# Altium PCB Vertigo Core.PcbDoc (part 1 of 2)
Units mm, origin at the board's own origin, x right, y up, seen from the top; angles counter-clockwise.
Board outline 68.33 x 88.9 mm, 4 copper layers (Power, Signal1, Signal 2, Ground); 94 components, 110 nets, 437 pads, 167 vias.
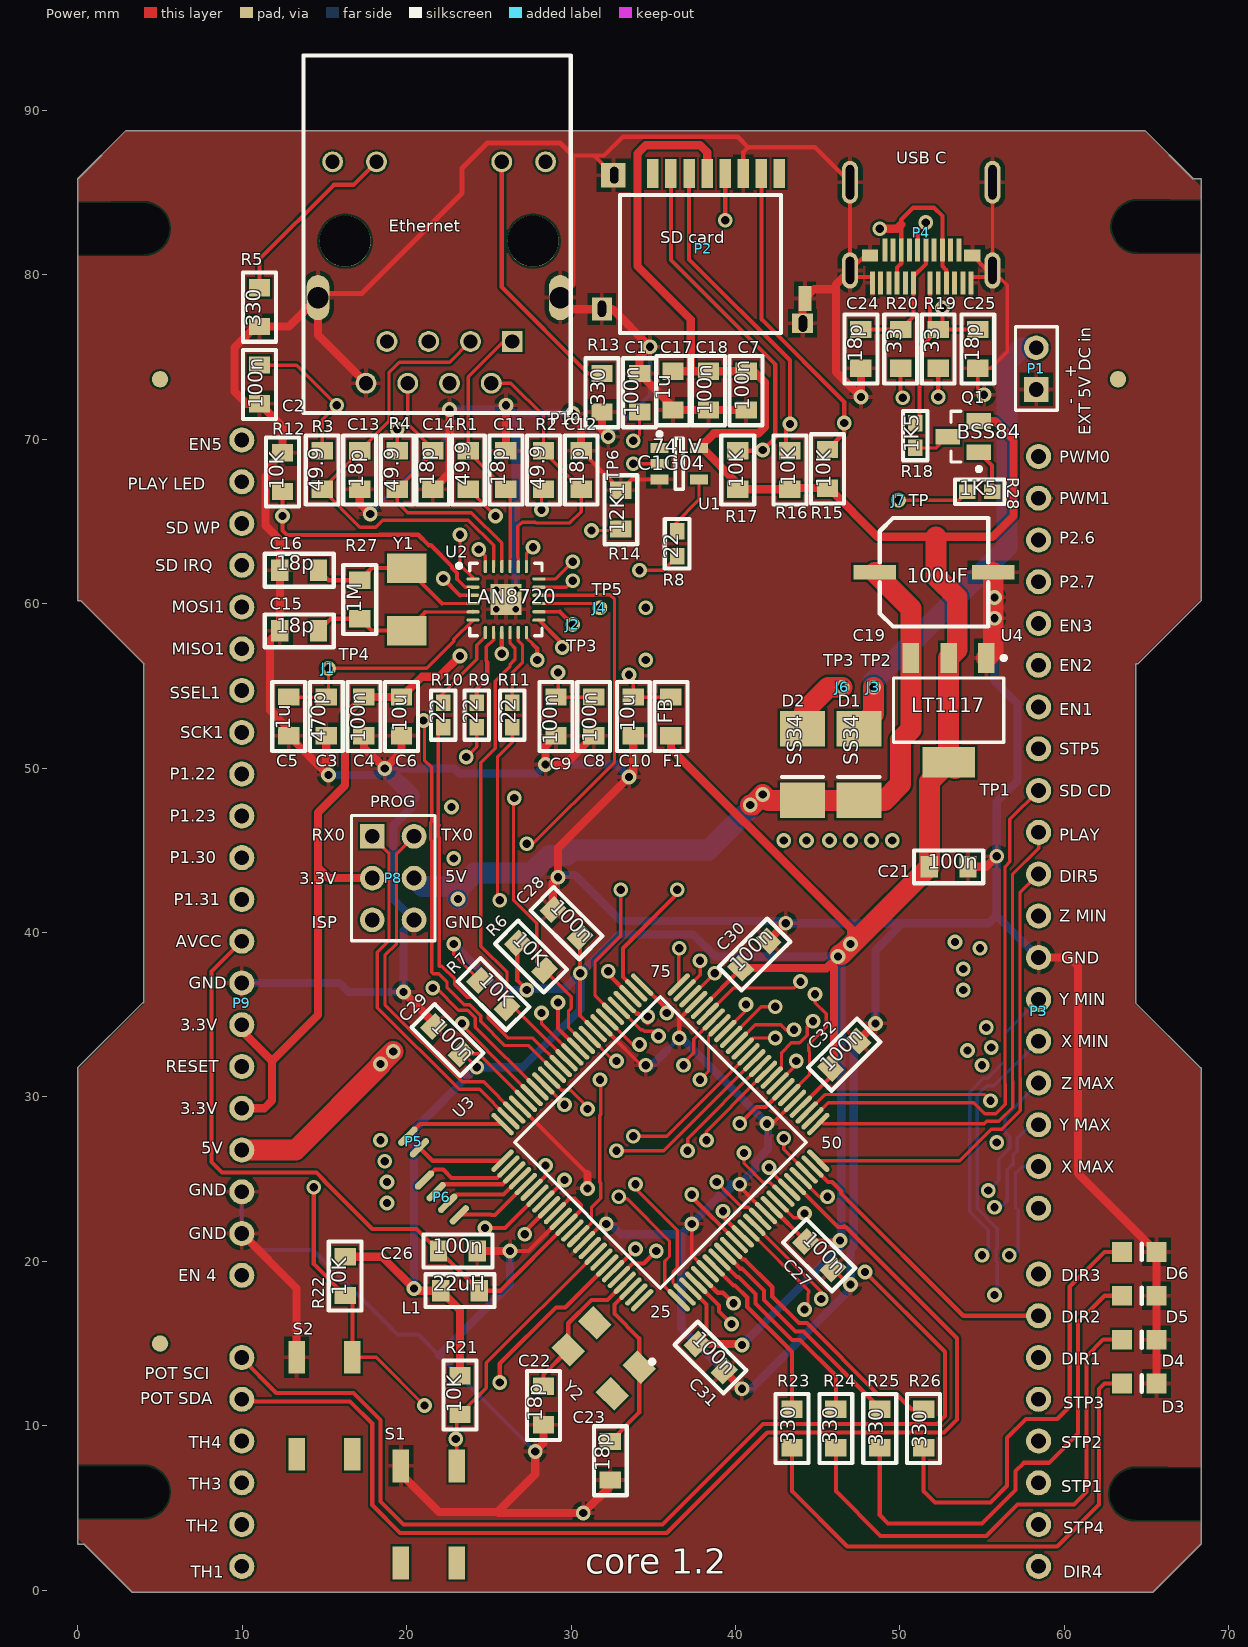
[diagram p0: Power view]
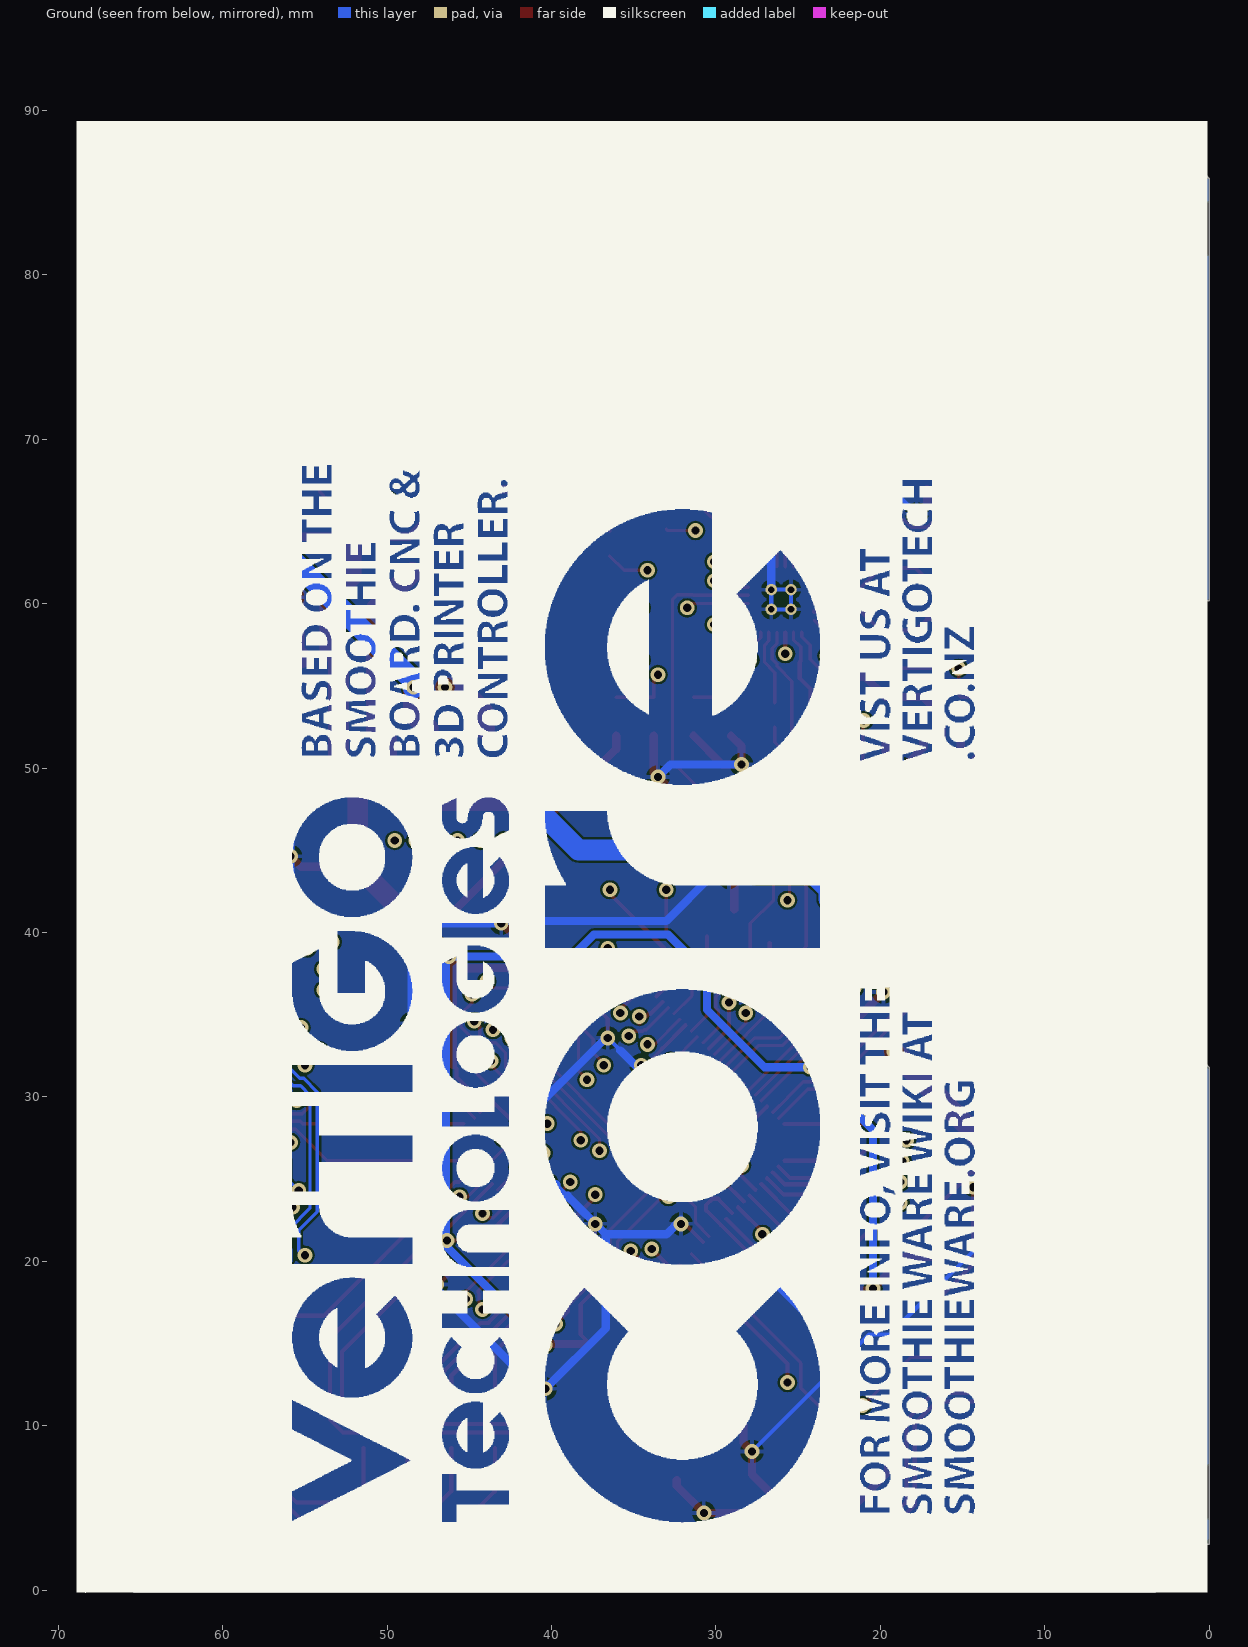
[diagram p1: Ground view, seen from below]
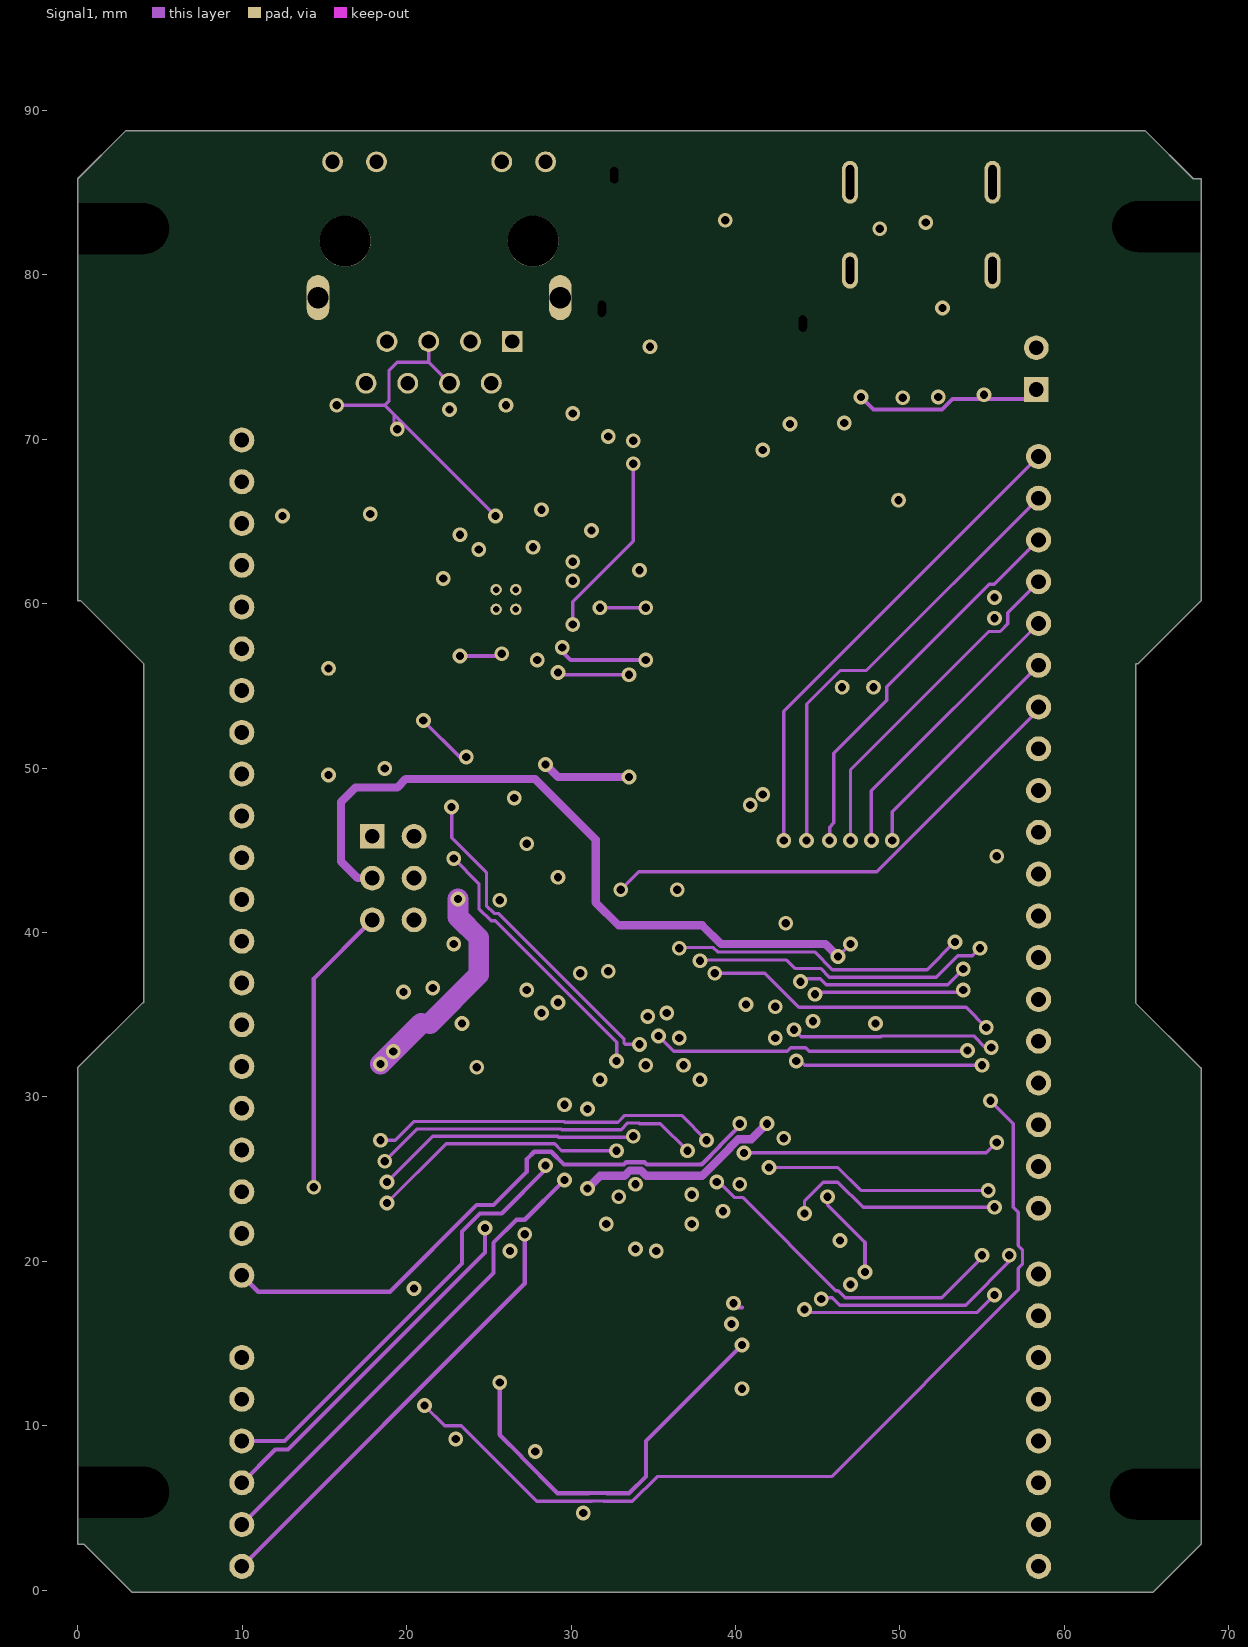
[diagram p2: Signal1]
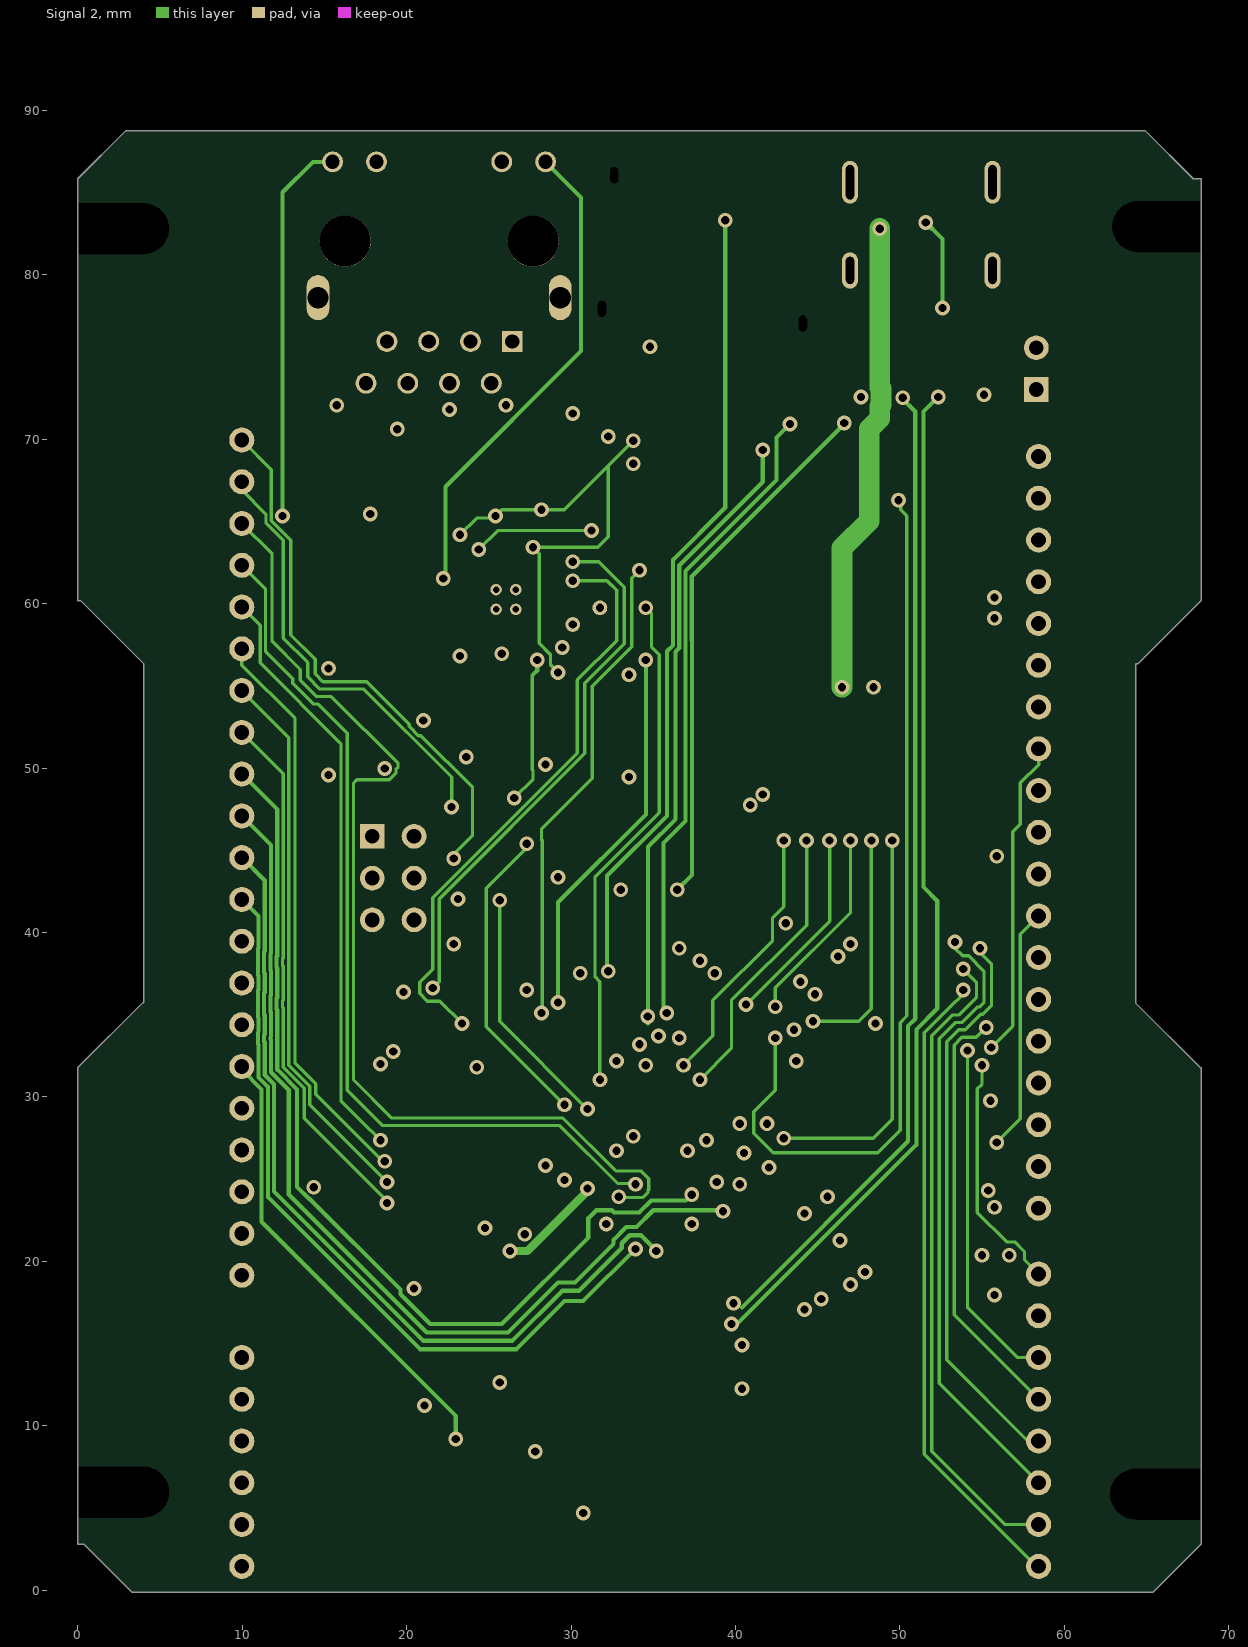
[diagram p3: Signal 2]

## Layer stack, top to bottom
Power: signal copper 0.0356
Dielectric: core 0.32, FR-4, Dk 4.8
Signal1: signal copper 0.0356
Dielectric: prepreg 0.32, FR-4, Dk 4.8
Signal 2: signal copper 0.0356
Dielectric: core 0.32, FR-4, Dk 4.8
Ground: signal copper 0.0356

## Board outline
3.175,0 3.302,-0.127 65.024,-0.127 65.389,-0.127 68.326,2.81 68.326,31.781 68.263,31.781 64.326,35.718 64.326,56.357 64.493,56.357 68.326,60.19 68.326,85.836 67.834,85.836 64.897,88.773 3.81,88.773 2.937,88.773 0,85.836 0,60.19 0.167,60.19 4,56.357 4,35.718 3.937,35.718 0,31.781 0,2.81 0.365,2.81 3.175,0

## Design rules (kind name [scope] priority, off if disabled: settings)
Clearance [All] p1: gap=0.127
DiffPairsRouting [All] p1: maxlimit=0.254 minlimit=0.254 mostfreqgap=0.254 maxuncoupledlength=12.7
MinimumSolderMaskSliver [All] p1: minsoldermaskwidth=0.076
PolygonConnect [All] p1: connectstyle=Relief reliefconductorwidth=0.254 reliefentries=4 polygonreliefangle="90 Angle" airgapwidth=0.254
RoutingVias [All] p1: holewidth=0.5 width=0.9 viastyle="Through Hole" minholewidth=0.5 minwidth=0.9 maxholewidth=0.5 maxwidth=0.9
SolderMaskExpansion [All] p1: expansion=0.102
Width [All] p1: maxlimit=1.27 minlimit=0.2 preferedwidth=0.254
26 further rules are at their usual default settings.

## Classes and differential pairs
component class "32 bit cnc v3.1": P10
differential pair NewDifferentialPair1: +TX0 -RX0

## Components (designator, comment, footprint, x,y, rotation, side; value= is the part's Value field where it differs from the comment)
C1 "100nF" 0805 34.163,72.825 r90 top
C2 "100nF" 0805 11.049,73.333 r270 top
C3 "470pF" 0805 15.113,53.14 r270 top
C4 "100nF" 0805 17.399,53.14 r270 top
C5 "1uF" 0805 12.827,53.14 r270 top
C6 "10uF" 0805 19.685,53.14 r270 top
C7 "100nF" 0805 40.64,72.952 r270 top
C8 "100nF" 0805 31.369,53.14 r270 top
C9 "100nF" 0805 29.083,53.14 r270 top
C10 "10uF" 0805 33.782,53.14 r270 top
C11 "18pf" 0805 26.035,68.126 r90 top
C12 "18pf" 0805 30.607,68.126 r90 top
C13 "18pf" 0805 17.145,68.126 r270 top
C14 "18pf" 0805 21.59,68.126 r270 top
C15 "18pF" 0805 13.462,58.347 r0 top
C16 "18pF" 0805 13.462,62.03 r0 top
C17 "1uF" 0805 36.195,72.952 r90 top
C18 "100nF" 0805 38.354,72.952 r90 top
C19 "10uF" "470uf/ 100uf 50v smd" 52.07,61.903 r270 top
C21 "100nF" 0805 52.959,43.996 r180 top
C22 "18pF" 0805 28.321,11.23 r90 top
C23 "18pF" 0805 32.385,7.874 r90 top
C24 "18pF" 0805 47.625,75.492 r270 top
C25 "18pF" 0805 54.737,75.492 r270 top
C26 "100nF" 0805 23.114,20.628 r0 top
C27 "100nF" 0805 45.085,20.374 r135 top
C28 "100nF" 0805 29.718,40.567 r315 top
C29 "100nF" 0805 22.479,33.455 r315 top
C30 "100nF" 0805 41.148,38.662 r225 top
C31 "100nF" 0805 38.481,14.151 r135 top
C32 "100nF" 0805 46.609,32.566 r225 top
D1 "SS34" Diode 47.498,52.451 r270 top
D2 "SS34" Diode 44.069,52.451 r270 top
D3 "LED2" "0805 LED" 63.5,12.573 r0 top
D4 "LED2" "0805 LED" 63.5,15.24 r0 top
D5 "LED2" "0805 LED" 63.5,17.907 r0 top
D6 "LED2" "0805 LED" 63.5,20.574 r0 top
F1 "ferrite bead" 0805 36.068,53.14 r90 top
J1 "TP4" "test point" 15.24,56.061 r0 top locked
J2 "TP6" "test point" 30.099,58.728 r0 top locked
J3 "TP2" "test point" 48.387,54.918 r0 top locked
J4 "TP5" "test point" 31.75,59.744 r0 top locked
J6 "TP3" "test point" 46.482,54.918 r0 top locked
J7 "TP6" "test point" 49.911,66.294 r0 top
L1 "22uH" 0805 23.241,18.215 r180 top
P1 "Header 2" HDR1X2 58.293,73.025 r90 top
P2 "micro sd" "DM3 SD card" 42.672,86.16 r180 top
P3 "gem shield 1 of 2" "gem shield 2 of 2" 58.433,1.451 r0 top locked
P4 "usb c socket" "USB C type" 55.626,80.264 r180 top
P5 "JTAG2" JTAG2 20.066,27.613 r315 top
P6 "JTAG" JTAG 21.082,24.946 r315 top
P8 "TTL" HDR2X3 17.907,45.847 r270 top
P9 "gem shield 2 of 2" "gem shield 1 of 2" 10.033,1.451 r0 top locked
P10 "HanRun HR911105A" Hanrun 29.972,93.091 r180 top
Q1 "BSS84" SOT23 53.848,70.158 r180 top
R1 "49.9" 0805 23.749,68.126 r270 top
R2 "49.9" 0805 28.321,68.126 r270 top
R3 "49.9" 0805 14.859,68.126 r90 top
R4 "49.9" 0805 19.431,68.126 r90 top
R5 "330" 0805 11.049,78.032 r90 top
R6 "10k" 0805 27.559,38.535 r135 top
R7 "10k" 0805 25.273,36.249 r135 top
R8 "22R" 0603 36.449,64.389 r270 top
R9 "22R" 0603 24.257,53.975 r270 top
R10 "22R" 0603 22.225,53.975 r270 top
R11 "22R" 0603 26.416,53.975 r270 top
R12 "10k" 0805 12.446,67.999 r90 top
R13 "330" 0805 31.877,72.825 r90 top
R14 "12.1k" 0805 33.02,65.713 r270 top
R15 "10k" 0805 45.593,68.199 r270 top
R16 "10k" 0805 43.307,68.126 r270 top
R17 "10k" 0805 40.132,68.126 r270 top
R18 "1.5K" 0603 50.927,69.469 r90 top
R19 "33R" 0805 52.324,75.492 r90 top
R20 "33R" 0805 50.038,75.492 r90 top
R21 "10k" 0805 23.241,11.865 r90 top
R22 "10k" 0805 16.256,19.104 r90 top
R23 "330" 0805 43.434,9.833 r270 top
R24 "330" 0805 46.101,9.833 r270 top
R25 "330" 0805 48.768,9.833 r270 top
R26 "330" 0805 51.435,9.833 r270 top
R27 "1M" 0805 17.145,60.252 r270 top
R28 "1.5K" 0603 54.102,66.802 r0 top
S1 "SW-PB" SMD_push_button 19.05,0.562 r90 top
S2 "SW-PB" SMD_push_button 12.7,7.166 r90 top
U1 "74LVC1G04" SOT23-5 36.576,68.507 r0 top
U2 "LAN8720" QFN50P400X400X100-24N 26.035,60.252 r0 top
U3 "LPC1769" TSQFP50P1600X1600X160_HS-101N 35.433,27.232 r45 top
U4 "LT1117-3.3v" SOT223 52.959,53.521 r270 top
Y1 "25 MHz" "25 MHz crystal M445" 18.796,57.458 r90 top
Y2 "12 MHz" SMD_crystal 32.512,11.938 r135 top
? "" fiducial#1 2,2 r0 top
? "" fiducial#2 2,86.646 r0 top
? "" fiducial#3 70.612,78.867 r0 top

## Footprints (in the part's own frame and the unit in brackets; to place one, negate y for a bottom-side part, rotate by r counter-clockwise, add the part's x,y. Pads: shape width x height; smd on the part's side, far side on the other; paste and mask are expansions set on the pad)
"25 MHz crystal M445" [mm]
  rect 1.8x2.4 smd: 1(0.9,-1.2) 2(4.7,-1.2)
"470uf/ 100uf 50v smd" [mm]
  rect 0.9x2.6 smd: 1(0,-3.6) 2(0,3.6)
  silkscreen extent -3.3,-3.3 3.3,3.3
0603 [mm]
  rect 1x0.9 smd: 1(0,0) 2(1.5,0)
  silkscreen extent -0.75,-0.75 2.25,0.75, body extent 0,-0.5 1.5,0.5, height 3
0805 [mm]
  rect 1.05x1.3 smd: 1(-1.175,0) 2(1.175,0)
  silkscreen extent -2.1,-1 2.1,1, body extent -1.15,-0.67 1.15,0.68, height 0.76
"0805 LED" [mm]
  rect 1.2x1.2 smd: 1(0,0) 2(2.1,0)
  silkscreen extent 1.2,-0.5 1.2,0.5, body extent 0,-0.6 2.1,0.6, height 2
Diode [mil]
  rect 85x107.99 smd: 1(1.96,0) 2(174.02,0)
  silkscreen extent 118,-49 118,49, body extent 10,-59 167,59, height 197
"DM3 SD card" [mm]
  rect 0.7x1.75 smd: 1(7.7,0) 2(6.6,0) 3(5.5,0) 4(4.4,0) 5(3.3,0) 6(2.2,0) 7(1.1,0) 8(0,0)
  round 0 hole 0.5 slot 1 at 90 deg: 9(10.05,0.1) 10(10.8,8.225) 13(-1.425,9.125)
  rect 1.5x1.5 smd: 9(10.1,0.1)
  rect 1.2x1.4 smd: 10(10.8,8.25)
  rect 0.8x1.5 smd: 12(-1.55,7.6)
  rect 1.25x1.2 smd: 13(-1.4,9.1)
  silkscreen extent -0.1,1.3 9.7,9.7
fiducial#1 [mm]
  round 1 smd paste+0 mask+0.5: 0(3,13)
fiducial#2 [mm]
  round 1 smd paste+0 mask+0.5: 0(3,-13)
fiducial#3 [mm]
  round 1 smd paste+0 mask+0.5: 0(-7.352,-5.221)
"gem shield 1 of 2" [mm]
  round 1.524 hole 0.9: 1(-0.06,68.5) 2(-0.06,65.96) 3(-0.06,63.42) 4(-0.06,60.88) 5(-0.06,58.34) 6(-0.06,55.8) 7(-0.06,53.26) 8(-0.06,50.72) 9(-0.06,48.18) 10(-0.06,45.64) 11(-0.06,43.1) 12(-0.06,40.56) 13(-0.06,38.02) 14(-0.06,35.48) 15(-0.06,32.94) 16(-0.06,30.4) 17(-0.06,27.86) 18(-0.06,25.32) 19(-0.06,22.78) 20(-0.06,20.24) 21(-0.06,17.7) 22(-0.06,12.7) 23(-0.06,10.16) 24(-0.06,7.62) 25(-0.06,5.08) 26(-0.06,2.54) 27(-0.06,0)
"gem shield 2 of 2" [mil]
  round 60 hole 35.43: 28(0,0) 29(0,100) 30(0,200) 31(0,300) 32(0,400) 33(0,500) 34(0,600) 35(0,700) 36(0,857.48) 37(0,957.48) 38(0,1057.48) 39(0,1157.48) 40(0,1257.48) 41(0,1357.48) 42(0,1457.48) 43(0,1557.48) 44(0,1657.48) 45(0,1757.48) 46(0,1857.48) 47(0,1957.48) 48(0,2057.48) 49(0,2157.48) 50(0,2257.48) 51(0,2357.48) 52(0,2457.48) 53(0,2557.48) 54(0,2657.48)
Hanrun [mil]
  rect 50x50 hole 34.02: 1(140,675)
  round 50 hole 34.02: 2(190,775) 3(240,675) 4(290,775) 5(340,675) 6(390,775) 7(440,675) 8(490,775) 9(60,245) 10(165,245) 11(465,245) 12(570,245)
  round 122.05 hole 122.05: 13(540,435) 14(90,435)
  oval 54.02x107.99 hole 51.18: 16(25,570) 16(605,570)
  silkscreen extent 0,-10 640,846, body extent 5,-4 630,839, height 551
HDR1X2 [mm] "Connector; Header; 2 Position"
  rect 1.5x1.5 hole 0.9: 1(0,0)
  round 1.5 hole 0.9: 2(2.54,0)
  silkscreen extent -1.27,-1.27 3.81,1.27
HDR2X3 [mm] "Connector; Header; 3x2 Position"
  rect 1.5x1.5 hole 0.9: 1(0,0)
  round 1.5 hole 0.9: 2(0,2.54) 3(2.54,0) 4(2.54,2.54) 5(5.08,0) 6(5.08,2.54)
  silkscreen extent -1.27,-1.27 6.35,3.81
JTAG [mm]
  oval 0.4x1.5 smd: 1(0,0) 2(1,0) 3(2,0) 4(3,0)
JTAG2 [mm]
  oval 0.4x1.5 smd: 1(0,0) 2(1,0)
QFN50P400X400X100-24N [mm] "QFN, 24-Leads, Body 4.00x4.00mm, Pitch 0.50mm, IPC Medium Density"
  oval 0.8x0.2 smd: 1(-2,1.25) 2(-2,0.75) 3(-2,0.25) 4(-2,-0.25) 5(-2,-0.75) 6(-2,-1.25) 13(2,-1.25) 14(2,-0.75) 15(2,-0.25) 16(2,0.25) 17(2,0.75) 18(2,1.25)
  oval 0.2x0.8 smd: 7(-1.25,-2) 8(-0.75,-2) 9(-0.25,-2) 10(0.25,-2) 11(0.75,-2) 12(1.25,-2) 19(1.25,2) 20(0.75,2) 21(0.25,2) 22(-0.25,2) 23(-0.75,2) 24(-1.25,2)
  round 0.7 hole 0.4: 25(-0.6,-0.6) 25(-0.6,0.6) 25(0.6,-0.6) 25(0.6,0.6)
  rect 1.9x1.9 smd: 25(0,0)
  silkscreen extent -2.97,-2.2 2.2,2.2, body extent -2.05,-2.05 2.05,2.05, height 1
SMD_crystal [mm]
  rect 1.6x1.3 smd: 0(0,0) 0(3.8,-2.3) 1(0,-2.3) 2(3.8,0)
SMD_push_button [mm]
  rect 2x1 smd: 0(1.1,-0.6) 0(1.1,-4) 1(7,-0.6) 2(7,-4)
  body extent 1,-4 7.1,-0.6, height 9
SOT23 [mm] "SOT23, 3-Leads, Body 2.92x2.40mm, Pitch 0.95mm, IPC Medium Density"
  rect 1.5x0.95 smd: 1(-0.95,0.95) 2(-0.95,-0.95) 3(0.95,0)
  silkscreen extent -1.08,-1.55 0.75,2.1, body extent -0.75,-1.56 0.75,1.56, height 1.2
SOT23-5 [mm] "SOT23, 5-Leads, Body 2.90x2.80mm, Pitch 0.95mm, IPC Medium Density"
  rect 1.1x0.6 smd: 1(-1.2,0.95) 2(-1.2,0) 3(-1.2,-0.95) 4(1.2,-0.95) 5(1.2,0.95)
  silkscreen extent -1.32,-1.55 0.25,1.92, body extent -0.87,-1.52 0.87,1.53, height 1.45
SOT223 [mm] "SOT223, 4-Leads, Body 6.50x7.00mm (avg), Pitch 2.30mm, IPC Medium Density"
  rect 1.85x1 smd: 1(-3.175,-2.3) 2(-3.175,2.3) 3(-3.175,0)
  rect 1.85x3.2 smd: 3(3.175,0)
  silkscreen extent -3.3,-3.35 1.95,3.48, body extent -1.85,-3.35 1.85,3.35, height 1.6
"test point" [mm]
  round 0.9 hole 0.5: 1(0,0)
TSQFP50P1600X1600X160_HS-101N [mm] "TSQFP, 100-Leads, Body 14.00x14.00mm, Pitch 0.50mm, Thermal Pad 10.00x10.00mm, IPC Medium Density"
  round 1 on Top Paste: 0(-7.975,7.975) 0(7.95,-7.95)
  round 1.524 on Top Solder: 0(-7.975,7.975) 0(7.95,-7.95)
  oval 1.8x0.3 smd: 1(-7.575,6) 2(-7.575,5.5) 3(-7.575,5) 4(-7.575,4.5) 5(-7.575,4) 6(-7.575,3.5) 7(-7.575,3) 8(-7.575,2.5) 9(-7.575,2) 10(-7.575,1.5) 11(-7.575,1) 12(-7.575,0.5) 13(-7.575,0) 14(-7.575,-0.5) 15(-7.575,-1) 16(-7.575,-1.5) 17(-7.575,-2) 18(-7.575,-2.5) 19(-7.575,-3) 20(-7.575,-3.5) 21(-7.575,-4) 22(-7.575,-4.5) 23(-7.575,-5) 24(-7.575,-5.5) 25(-7.575,-6) 51(7.575,-6) 52(7.575,-5.5) 53(7.575,-5) 54(7.575,-4.5) 55(7.575,-4) 56(7.575,-3.5) 57(7.575,-3) 58(7.575,-2.5) 59(7.575,-2) 60(7.575,-1.5) 61(7.575,-1) 62(7.575,-0.5) 63(7.575,0) 64(7.575,0.5) 65(7.575,1) 66(7.575,1.5) 67(7.575,2) 68(7.575,2.5) 69(7.575,3) 70(7.575,3.5) 71(7.575,4) 72(7.575,4.5) 73(7.575,5) 74(7.575,5.5) 75(7.575,6)
  oval 0.3x1.8 smd: 26(-6,-7.575) 27(-5.5,-7.575) 28(-5,-7.575) 29(-4.5,-7.575) 30(-4,-7.575) 31(-3.5,-7.575) 32(-3,-7.575) 33(-2.5,-7.575) 34(-2,-7.575) 35(-1.5,-7.575) 36(-1,-7.575) 37(-0.5,-7.575) 38(0,-7.575) 39(0.5,-7.575) 40(1,-7.575) 41(1.5,-7.575) 42(2,-7.575) 43(2.5,-7.575) 44(3,-7.575) 45(3.5,-7.575) 46(4,-7.575) 47(4.5,-7.575) 48(5,-7.575) 49(5.5,-7.575) 50(6,-7.575) 76(6,7.575) 77(5.5,7.575) 78(5,7.575) 79(4.5,7.575) 80(4,7.575) 81(3.5,7.575) 82(3,7.575) 83(2.5,7.575) 84(2,7.575) 85(1.5,7.575) 86(1,7.575) 87(0.5,7.575) 88(0,7.575) 89(-0.5,7.575) 90(-1,7.575) 91(-1.5,7.575) 92(-2,7.575) 93(-2.5,7.575) 94(-3,7.575) 95(-3.5,7.575) 96(-4,7.575) 97(-4.5,7.575) 98(-5,7.575) 99(-5.5,7.575) 100(-6,7.575)
  silkscreen extent -6.27,-6.28 6.28,6.27, body extent -7,-7 7,7, height 1.6
"USB C type" [mm]
  oval 1x2.2 hole 0.5 slot 1.65 at 90 deg: 0(0,0) 0(8.665,0)
  oval 1x2.6 hole 0.5 slot 2.1 at 90 deg: 0(0,-5.362) 0(8.665,-5.362)
  rect 0.3x1.4 smd: 1(1.3,0.75) 2(1.8,0.75) 3(2.3,0.75) 4(2.8,0.75) 5(3.3,0.75) 6(3.8,0.75) 7(4.8,0.75) 8(5.3,0.75) 9(5.8,0.75) 10(6.3,0.75) 11(6.8,0.75) 12(7.3,0.75) 14(6.55,-1.25) 15(6.05,-1.25) 16(5.55,-1.25) 17(5.05,-1.25) 18(4.55,-1.25) 19(4.05,-1.25) 20(3.55,-1.25) 21(3.05,-1.25) 22(2.55,-1.25) 23(2.05,-1.25)
  rect 1x0.725 smd: 13(7.45,-0.9) 24(1.22,-0.9)

## Part data
C1 C2 C3 C4 C7 C8 C9 C11 C12 C13 C14 C15 C16 C17 C18 C21 C22 C23 C24 C25 C26 C27 C28 C29 C30 C31 C32: library part "Cap Semi", "Capacitor (Semiconductor SIM Model)"
C5 C6 C10 C19: library part "Cap Pol1", "Polarized Capacitor (Radial)"
D1 D2: library part "Diode 1N914", "High Conductance Fast Diode"
D3 D4 D5 D6: "Typical RED, GREEN, YELLOW, AMBER GaAs LED"
J1 J2 J3 J4 J6 J7: library part Socket, "Socket"
L1: library part Inductor, "Inductor"
P1: "Header, 2-Pin"
P4: "Mouser 538-105450-0101"
P8: library part "Header 3X2", "Header, 3-Pin, Dual row"
P10: library part RJ45
Q1: library part MOSFET-P, "P-Channel MOSFET"
R1 R2 R3 R4 R5 R6 R7 R8 R9 R10 R11 R12 R13 R14 R15 R16 R17 R18 R19 R20 R21 R22 R23 R24 R25 R26 R27 R28: library part Res1, "Resistor"
S1 S2: "Switch"
Y1 Y2: library part XTAL, "Crystal Oscillator"

## Free pads (board coordinates)
  round 1.524 hole 3.1 square: 0(1.524,5.969) 0(1.524,82.804) 0(66.802,5.842) 0(66.802,82.931)
  round 1.524 hole 3.1 slot 5 at 0 deg: 0(3.048,5.969) 0(3.048,82.804) 0(65.278,5.842) 0(65.405,82.931)

## Via types
v1: diameter 0.9, hole 0.5, Power to Ground, tented both sides, 165 vias
v2: diameter 0.9, hole 0.5, Power to Ground, 2 vias

## Nets (pads, with @x,y where several pads share a name; then routed paths per layer and width w, separated by ;. In a path a pad name is that pad's centre, name@x,y a point inside that pad or via, vN(x,y) a via of type N, cw(c..) or ccw(c..) an arc to the next point about the centre after c; other vN are vias at no path point)
3.3V: C4.1 C6.1 C7.1 C17.2 C18.2 C21.2 C27.2 C28.2 C29.2 C30.2 C31.2 C32.2 F1.1 L1.2 P2.4 P8.3 P9.15 P9.17 Q1.2 R6.2 R7.2 R15.2 R16.2 R17.2 R21.2 R22.2 U1.5 U2.9 U3.19 U3.28 U3.42 U3.54 U3.71 U3.84 U3.96 U4.3 | length 375.9
  Power w0.2: v1(22.86,39.297) 22.86,38.662 R7.2@24.442,37.08
  Power w0.203: v1(20.447,18.342) v1@20.574,18.215 ; C29.2@23.31,32.624 C29.2@23.437,32.624 ; v1(24.257,31.804) C29.2@23.437,32.624 ; U3.96@27.248,29.76 24.384,32.624 C29.2@23.437,32.624 ; 30.549,34.945 U3.84@31.491,34.003
  Power w0.254: v1(25.654,12.627) 25.654,13.77 29.083,17.199 29.643,17.199 U3.19@32.198,19.754 ; v1(25.781,56.95) 25.785,56.954 U2.9@25.785,58.252 ; R6.2@26.728,39.366 26.728,37.08 v1(27.305,36.503) ; 30.549,34.945 v1(30.549,37.519) C28.2@30.549,39.736 ; U3.28@37.254,18.34 38.227,17.367 38.227,15.559 C31.2@37.65,14.982 ; U1.5@37.776,69.58 U1.5@37.776,69.457 U1.5@37.985,69.457 ; U3.71@37.961,35.417 40.317,37.773 C30.2@40.317,37.831 C30.2@40.328,37.842 ; R17.2@40.132,66.951 R17.2@40.132,67.31 ; v1@40.317,14.982 v1(40.386,14.913) ; C7.1@40.64,74.127 C7.1@41.116,74.127 ; U3.42@42.204,23.29 C27.2@44.254,21.239 ; U3.54@43.971,29.406 45.778,31.213 C32.2@45.778,31.735 C32.2@45.989,31.946 ; C27.2@44.254,21.205 44.312,21.263 v1(46.355,21.263) ; 44.286,37.842 44.297,37.831 ; 45.778,38.085 v1(46.228,38.535) v1@46.355,38.662
  Power w0.5: P9.17@9.973,29.311 11.35,29.311 11.811,29.772 11.811,32.185 ; P9.15@9.973,34.391 9.973,34.023 11.811,32.185 ; R22.2@16.256,20.279 18.51,20.279 v1(20.447,18.342) ; P8.3@17.907,43.307 15.24,43.307 14.605,43.942 ; v1@20.574,18.215 L1.2@22.066,18.215 23.241,17.04 R21.2@23.241,13.04 ; v1(23.241,56.823) 21.971,55.553 20.923,55.553 C6.1@19.685,54.315 C4.1@17.399,54.315 16.256,53.172 16.256,48.949 14.605,47.298 14.605,43.942 ; F1.1@36.068,51.965 36.068,51.147 40.475,46.74 40.509,46.74 47.038,40.211 v1@47.038,39.25 ; C17.2@36.195,74.127 C18.2@38.354,74.127 C7.1@40.64,74.127 ; 37.274,74.191 37.274,77.279 34.036,80.518 34.036,87.376 34.544,87.884 37.846,87.884 38.272,87.458 P2.4@38.272,86.16 ; C31.2@37.65,14.982 v1@40.317,14.982 ; U1.5@37.985,69.457 R17.2@40.132,67.31 ; R17.2@40.132,66.951 42.291,66.951 R16.2@43.307,66.951 43.38,67.024 R15.2@45.593,67.024 45.679,67.024 48.641,64.062 52.197,64.062 55.626,64.062 56.896,65.332 56.896,69.977 55.765,71.108 Q1.2@54.798,71.108 ; C30.2@40.328,37.842 44.286,37.842 ; C7.1@41.116,74.127 41.783,73.46 ; 44.297,37.831 45.524,37.831 45.778,38.085 45.989,37.874 C32.2@45.989,31.946 ; 11.811,32.185 14.605,34.979 14.605,43.942
  Power w0.508: U1.5@37.776,69.457 38.677,70.358 41.402,70.358 41.783,70.739 41.783,73.46
  Power w1.27: v1@46.355,38.662 46.45,38.662 47.038,39.25 C21.2@51.784,43.996 51.784,49.171 U4.3@52.959,50.346 ; 52.197,64.062 52.197,61.649 53.481,60.365 53.481,57.218 U4.3@52.959,56.696 U4.3@52.959,50.346 ; U4.3@53.34,49.965 U4.3@52.959,50.346
  Signal1 w0.2: v1(46.228,38.535) v1(46.99,39.297)
  Signal1 w0.254: v1(23.241,56.823) 25.654,56.823 v1(25.781,56.95) ; v1(25.654,12.627) 25.654,9.452 26.982,8.124 26.982,8.092 29.178,5.896 31.076,5.896 31.091,5.911 32.155,5.911 32.17,5.896 33.528,5.896 34.544,6.912 34.544,9.071 v1(40.386,14.913)
  Signal1 w0.5: P8.3@17.907,43.307 17.018,43.307 16.002,44.323 16.002,47.933 16.891,48.822 19.431,48.822 19.939,49.33 27.813,49.33 31.496,45.647 31.496,41.837 32.893,40.44 37.973,40.44 39.116,39.297 45.466,39.297 v1(46.228,38.535)
  Signal 2 w0.254: v1@27.178,36.503 v1(27.305,36.503)
  Ground w0.254: v1(27.305,36.503) v1@27.374,36.572 ; v1(46.228,38.535) v1@46.424,38.339 ; v1@46.355,20.882 v1(46.355,21.263) v1@46.424,21.332
  Ground w0.5: v1(20.447,18.342) 20.447,27.994 v1(24.257,31.804) 27.051,31.804 30.549,35.302 v1(30.549,37.519) ; v1(22.86,39.297) 25.654,36.503 v1(27.305,36.503) ; v1@27.374,36.572 29.602,36.572 v1(30.549,37.519) ; v1(40.386,14.913) v1@46.355,20.882 ; v1@46.424,21.332 v1@46.424,38.339 ; v1(46.99,39.297) v1(46.228,38.535) 38.767,38.535 37.428,39.874 32.904,39.874 v1(30.549,37.519)
5V: D1.1 J3.1 P1.2 | length 28.2
  Power w1.27: D1.1@47.498,52.401 48.387,53.29 J3.1@48.387,54.918
  Ground w1.27: J3.1@48.387,54.878 J3.1@48.387,54.918 48.387,55.299 56.515,63.427 56.515,74.676 57.404,75.565 P1.2@58.293,75.565
5VIN: C19.1 D1.2 D2.2 P8.4 P9.18 U4.1 | length 73.1
  Power w1.27: P9.18@9.973,26.771 13.255,26.771 18.415,31.931 v1(18.415,32.004) v1(19.177,32.766) ; v1(40.894,47.752) 41.021,47.752 v1(41.656,48.387) 42.012,48.031 D2.2@44.069,48.031 D1.2@47.498,48.031 49.047,48.031 50.038,49.022 50.038,51.717 50.659,52.338 U4.1@50.659,56.696 50.659,59.714 C19.1@48.47,61.903
  Signal1 w1.27: v1(18.415,32.004) v1(19.177,32.766) 20.882,34.471 ; 21.407,34.471 24.384,37.448 24.384,39.678 23.114,40.948 v1(23.114,42.037)
  Ground w1.27: P8.4@20.447,43.307 20.955,42.799 22.914,42.799 23.114,42.599 ; v1(23.114,42.037) 23.114,42.599 ; v1(41.656,48.387) 41.021,47.752 v1(40.894,47.752) 40.894,47.552 38.354,45.012 30.099,45.012 29.787,44.7 28.655,44.7 27.57,43.615 24.13,43.615 23.114,42.599
AGND: C1.2 C2.2 C3.2 C4.2 C5.2 C6.2 C7.2 C8.2 C9.2 C10.2 C11.2 C12.2 C13.2 C14.2 C15.1 C16.1 C17.1 C18.1 C19.2 C21.1 C22.1 C23.1 C24.2 C25.2 C26.2 C27.1 C28.1 C29.1 C30.1 C31.1 C32.1 D3.2 D4.2 D5.2 D6.2 P1.1 P2.6 P2.9 P2.10 P2.12 P2.13 P3.42 P4.0 P4.1 P4.12 P4.13 P4.24 P8.6 P9.14 P9.19 P9.20 P10.8 P10.16 R5.1 R12.2 R13.1 R14.1 S1.1 S2.1 U1.3 U2.25 U3.11 U3.15 U3.31 U3.41 U3.55 U3.72 U3.83 U3.97 U4.2 | length 580.7
  Power w0.2: 33.274,32.927 34.27,31.931 v1(34.544,31.931) ; v1(37.338,22.279) 37.338,20.377 U3.31@38.314,19.401 ; v1@54.864,72.698 v1(55.118,72.698) 54.737,73.079 C25.2@54.737,74.317 55.521,74.317 56.515,75.311 56.515,79.375 P4.0@55.626,80.264 P4.0@55.626,85.626
  Power w0.254: R5.1@11.049,76.857 R5.1@11.398,76.857 ; C5.2@12.827,51.965 C5.2@12.827,52.378 ; v1@15.113,49.679 15.208,49.584 v1(15.24,49.584) ; S1.1@19.65,7.074 S1.1@19.65,7.562 ; C29.1@21.648,34.286 C29.1@21.648,34.54 ; v1(22.606,71.809) v1@22.621,71.794 ; v1(26.289,20.628) 27.415,20.628 U3.11@29.37,22.583 ; U3.97@26.895,29.406 30.988,25.313 ; 28.887,43.038 v1(29.21,43.361) ; 30.099,87.249 31.383,87.249 ; C12.2@30.607,69.301 R14.1@33.02,66.888 33.689,67.557 U1.3@35.376,67.557 ; U3.15@30.784,21.169 30.784,21.186 31.877,22.279 v1(32.131,22.279) ; U3.83@31.844,34.356 33.274,32.927 ; P2.9@32.572,86.303 P2.9@32.572,86.06 31.383,87.249 ; v1(33.528,49.457) v1@33.782,49.711 ; C17.1@36.195,71.777 C17.1@36.195,71.968 ; v1(36.576,33.582) 36.576,34.739 U3.72@37.607,35.77 ; v1(40.259,24.692) 40.259,24.527 U3.41@41.85,22.936 ; P2.6@40.513,86.201 P2.6@40.472,86.16 40.472,87.462 40.767,87.757 ; v1(41.91,28.375) 42.037,28.502 42.36,28.502 U3.55@43.618,29.76 ; P2.12@44.072,78.41 P2.12@44.222,78.56 ; C27.1@45.916,19.543 46.99,18.469 v1(46.99,18.596) ; P4.13@48.176,81.164 47.861,81.164 P4.0@46.961,80.264 ; P4.12@48.326,79.864 47.361,79.864 P4.0@46.961,80.264 ; P4.1@54.326,79.864 55.226,79.864 P4.0@55.626,80.264 55.306,80.264 P4.24@54.406,81.164 ; P1.1@57.944,72.793 P1.1@58.293,72.444 ; 31.383,87.249 32.004,87.249 33.147,88.392 40.132,88.392 40.767,87.757 ; 40.767,87.757 44.83,87.757 P4.0@46.961,85.626 P4.0@46.961,80.264
  Power w0.305: P10.16@14.605,78.613 14.859,78.867 17.272,78.867 23.368,84.963 23.368,86.487 24.892,88.011 29.337,88.011 30.099,87.249 30.099,79.375 P10.16@29.337,78.613
  Power w0.5: P9.20@9.973,21.691 13.3,18.364 S2.1@13.3,14.166 ; R5.1@11.049,76.857 10.817,76.857 9.525,75.565 9.525,72.898 10.265,72.158 C2.2@11.049,72.158 12.446,70.761 R12.2@12.446,69.174 11.557,68.285 11.557,67.872 11.415,67.73 11.415,64.756 12.287,63.884 C16.1@12.287,62.03 C15.1@12.287,58.347 11.684,57.744 11.684,53.521 C5.2@12.827,52.378 ; R5.1@11.398,76.857 12.849,76.857 P10.16@14.605,78.613 14.605,76.327 P10.8@17.526,73.406 ; C5.2@12.827,51.965 15.113,49.679 C3.2@15.113,51.965 ; C13.2@17.145,66.951 17.145,66.094 v1(17.78,65.459) ; C4.2@17.399,51.965 17.399,51.235 v1(18.669,49.965) 19.685,50.981 C6.2@19.685,51.965 ; S1.1@19.65,7.074 21.971,4.753 25.527,4.753 ; v1(19.812,36.376) C29.1@21.648,34.54 ; C14.2@21.59,66.951 22.621,67.982 v1@22.621,71.794 ; C26.2@24.289,20.628 v1(26.289,20.628) ; C11.2@26.035,69.301 v1(26.035,72.063) ; C22.1@28.321,10.055 28.321,8.944 v1(27.813,8.436) 27.813,7.039 25.527,4.753 ; C28.1@28.887,41.398 28.887,43.038 ; C9.2@29.083,51.965 28.448,51.33 v1(28.448,50.219) 29.623,50.219 C8.2@31.369,51.965 ; v1(29.21,43.361) 29.21,45.139 v1(33.528,49.457) ; P10.16@29.337,78.613 30.04,77.91 P2.10@31.872,77.91 32.507,77.91 v1(34.798,75.619) 34.163,74.984 C1.2@34.163,74 C17.1@36.195,71.968 ; v1(30.099,71.555) 30.607,71.047 C12.2@30.607,69.301 ; v1(30.988,24.438) 30.988,25.313 ; R13.1@31.877,71.65 31.877,70.539 v1(32.258,70.158) ; C23.1@32.385,6.699 32.385,6.35 v1(30.734,4.699) 25.581,4.699 25.527,4.753 ; v1@33.782,49.711 C10.2@33.782,51.965 ; C17.1@36.195,71.777 C18.1@38.354,71.777 C7.2@40.64,71.777 ; C31.1@39.312,13.32 v1(40.386,12.246) ; C30.1@41.979,39.493 v1(43.053,40.567) ; P2.13@44.072,77.06 P2.12@44.072,78.41 ; P2.12@44.222,78.56 44.783,79.121 46.101,79.121 ; P4.0@46.961,80.264 46.101,79.404 46.101,79.121 ; C32.1@47.44,33.397 v1(48.514,34.471) ; C24.2@47.625,74.317 v1(47.625,72.571) 46.101,74.095 46.101,79.121 ; C21.1@54.134,43.996 55.245,43.996 v1(55.88,44.631) ; P3.42@58.433,38.471 60.335,38.471 60.833,37.973 60.833,25.341 D6.2@65.6,20.574 D5.2@65.6,17.907 D4.2@65.6,15.24 D3.2@65.6,12.573
  Power w1.27: U4.2@55.259,56.696 55.67,57.107 C19.2@55.67,61.903
  Signal1 w0.2: v1(55.118,72.698) 55.372,72.444 55.626,72.444
  Signal1 w0.254: 39.682,26.92 39.682,26.941 ; v1(47.625,72.571) 48.383,71.813 52.562,71.813 53.193,72.444 55.372,72.444 P1.1@58.293,72.444
  Signal1 w0.5: v1(28.448,50.219) 29.21,49.457 v1(33.528,49.457) ; v1(30.988,24.438) 31.75,25.2 33.242,25.2 33.565,25.523 34.253,25.523 34.576,25.2 37.962,25.2 39.682,26.92 ; 39.682,26.941 40.169,27.428 40.963,27.428 v1(41.91,28.375)
  Signal 2 w0.254: v1@30.988,24.279 v1(30.988,24.438)
  Signal 2 w0.5: v1(26.289,20.628) 27.337,20.628 v1@30.988,24.279
  Ground w0.2: v1(34.544,31.931) v1@34.925,31.931 ; v1(55.753,59.109) v1(55.753,60.379)
  Ground w0.254: P9.19@9.973,24.231 P9.20@9.973,21.691 10.973,20.691 14.288,20.691 19.431,15.548 20.701,15.548 21.971,14.278 v1(27.813,8.436) ; v1@17.526,65.713 v1(17.78,65.459) 22.606,70.285 v1(22.606,71.809) ; v1@25.781,71.809 v1(26.035,72.063) ; 26.543,71.555 26.635,71.463 ; U2.25@26.635,59.652 U2.25@26.635,59.709 ; U2.25@26.67,59.744 U2.25@26.635,59.709 ; v1@28.194,49.965 v1(28.448,50.219) ; v1(29.21,43.361) v1@29.337,43.488 ; v1(30.099,71.555) 31.496,70.158 v1(32.258,70.158) 34.798,72.698 v1(34.798,75.619) ; v1(32.131,22.279) 31.877,22.279 32.131,22.533 v1@32.131,22.66 ; 35.814,32.82 v1(36.576,33.582) v1@36.703,33.582 ; 36.703,21.644 36.703,21.676 ; 39.015,23.988 39.206,23.988 ; 39.693,24.475 39.693,24.666 39.719,24.692 ; v1(41.91,28.375) v1@41.979,28.306 ; v1@42.926,40.694 v1(43.053,40.567) ; 47.186,33.143 v1(48.514,34.471) ; U2.25@26.635,59.709 26.578,59.652 U2.25@25.435,59.652 U2.25@25.435,60.852 U2.25@26.635,60.852 U2.25@26.635,59.709
  Ground w0.5: P9.14@9.973,36.931 15.901,36.931 ; v1(15.24,49.584) 18.288,49.584 v1(18.669,49.965) 22.899,49.965 23.203,49.661 27.89,49.661 v1@28.194,49.965 ; 16.002,36.83 15.901,36.931 ; 20.32,48.314 20.32,47.625 19.177,46.482 19.177,42.037 P8.6@20.447,40.767 19.812,40.132 v1(19.812,36.376) 16.456,36.376 15.901,36.931 ; 21.971,14.278 26.289,18.596 v1(26.289,20.628) ; v1(22.606,71.809) v1@25.781,71.809 ; v1(26.035,72.063) 26.543,71.555 v1(30.099,71.555) ; U2.25@26.635,60.852 26.635,71.463 ; v1(28.448,50.219) 32.766,50.219 v1(33.528,49.457) ; v1@29.337,43.488 30.226,43.488 33.02,40.694 v1@42.926,40.694 ; v1@32.131,22.533 33.02,21.644 36.703,21.644 36.703,15.929 v1(40.386,12.246) 40.926,12.246 46.99,18.31 v1(46.99,18.596) 46.99,20.723 47.186,20.919 47.186,33.143 ; v1@34.925,31.931 35.814,32.82 ; 36.703,21.676 39.015,23.988 ; v1@36.703,33.582 v1(41.91,28.375) ; 39.206,23.988 39.693,24.475 ; 39.719,24.692 v1(40.259,24.692) 41.206,25.639 41.206,26.052 41.979,26.825 v1@41.979,28.306 ; v1(43.053,40.567) 50.165,40.567 ; v1(48.514,34.471) 48.514,38.916 50.165,40.567 ; v1(55.753,59.109) 55.753,55.299 57.15,53.902 57.15,49.203 55.88,47.933 v1(55.88,44.631) 55.88,41.024 ; P3.42@58.433,38.471 55.88,41.024 ; 50.165,40.567 55.423,40.567 55.88,41.024
  Ground w1: v1(18.669,49.965) 20.32,48.314
AVCC: C26.1 L1.1 P9.13 U3.10 U3.12 | length 44.4
  Power w0.254: P9.13@9.973,39.471 8.128,37.626 8.128,26.035 8.763,25.4 14.509,25.4 14.986,24.923 14.986,24.892 17.907,21.971 20.596,21.971 C26.1@21.939,20.628 22.003,20.628 L1.1@24.416,18.215 25.709,18.215 U3.12@29.723,22.229 30.607,23.113 30.607,23.422 30.226,23.803 29.845,23.803 29.845,23.765 U3.10@29.016,22.936
DIR1: P3.33 U3.80 | length 43.7
  Power w0.2: U3.80@32.905,35.417 34.232,34.09 34.327,34.09 34.372,34.09 34.461,34.001 35.014,34.001 v1(35.306,33.709)
  Signal1 w0.2: v1(35.306,33.709) 36.237,32.778 43.144,32.778 43.355,32.989 44.275,32.989 44.486,32.778 54.06,32.778 v1(54.102,32.82)
  Signal 2 w0.2: v1(54.102,32.82) 54.102,17.199 57.15,14.151 P3.33@58.433,14.151
DIR2: P3.34 U3.49 | length 17.5
  Power w0.254: U3.49@44.678,25.765 45.624,24.819 ; 45.72,24.819 45.879,24.819 46.424,24.274 46.424,24.115 53.848,16.691 P3.34@58.433,16.691
DIR3: P3.35 U3.58 | length 27.9
  Power w0.2: U3.58@42.557,30.821 43.688,31.951 v1(43.688,32.185)
  Signal1 w0.2: v1(43.688,32.185) 43.942,32.185 44.196,31.931 v1(54.991,31.931)
  Signal 2 w0.2: v1(54.991,31.931) 54.991,30.782 54.695,30.486 54.695,22.969 56.486,21.178 56.975,21.178 57.573,20.58 57.573,20.091 P3.35@58.433,19.231
DIR4: P3.28 U3.56 | length 55.8
  Power w0.2: U3.56@43.264,30.113 44.492,31.341 44.492,32.772 44.45,32.814 44.45,33.2 45.508,34.258 45.508,35.058 44.831,35.735 v1(44.831,36.249)
  Signal1 w0.2: v1(44.831,36.249) 44.951,36.369 53.968,36.369 53.975,36.376 v1(53.848,36.503)
  Signal 2 w0.2: v1(53.848,36.503) 53.848,36.249 53.039,35.44 53.017,35.44 51.482,33.905 51.482,8.255 58.286,1.451 P3.28@58.433,1.451
DIR5: P3.44 U3.50 | length 28.4
  Power w0.2: U3.50@45.032,26.118 53.629,26.118 55.547,28.036 56.184,28.036 57.317,29.169 57.317,31.15 57.296,31.171 57.296,42.414 P3.44@58.433,43.551
EN1: P3.48 U3.81 | length 38.8
  Power w0.2: U3.81@32.552,35.063 32.552,35.066 31.454,36.164 31.454,38.239 33.02,39.805 v1(33.02,42.599)
  Signal1 w0.2: v1(33.02,42.599) 34.109,43.688 48.582,43.688 58.433,53.539 P3.48@58.433,53.711
EN2: P3.49 U3.48 | length 41
  Power w0.2: v1(42.926,27.486) 42.926,26.81 U3.48@44.325,25.411
  Signal1 w0.2: v1(49.53,45.593) 49.53,47.348 P3.49@58.433,56.251
  Signal 2 w0.2: v1(42.926,27.486) 48.387,27.486 49.53,28.629 v1(49.53,45.593)
EN3: P3.50 U3.59 | length 36.4
  Power w0.2: U3.59@42.204,31.174 42.799,31.77 42.799,32.693 43.392,33.286 43.894,33.286 44.365,33.757 44.365,34.259 v1(44.704,34.598)
  Signal1 w0.2: v1@48.26,45.466 v1(48.26,45.593) 48.26,48.618 P3.50@58.433,58.791
  Signal 2 w0.2: v1(44.704,34.598) 47.498,34.598 48.26,35.36 v1(48.26,45.593)
EN4: P9.21 U3.57 | length 39.9
  Power w0.254: v1(40.259,28.375) 41.275,29.391 41.835,29.391 U3.57@42.911,30.467
  Signal1 w0.254: P9.21@9.973,19.151 10.973,18.151 18.986,18.151 24.257,23.422 25.273,23.422 27.305,25.454 27.305,26.216 27.755,26.666 28.792,26.666 29.565,25.893 33.216,25.893 33.354,26.031 34.464,26.031 34.602,25.893 37.872,25.893 37.883,25.904 37.947,25.904 39.058,27.015 39.058,27.047 40.386,28.375 v1(40.259,28.375)
EN5: P9.1 U3.85 | length 52.2
  Power w0.2: U3.85@31.137,33.649 32.601,32.185 v1(32.766,32.185)
  Signal1 w0.2: v1(22.86,44.504) 24.396,42.968 24.396,41.443 25.133,40.706 25.382,40.706 32.766,33.322 v1(32.766,32.185)
  Signal 2 w0.2: P9.1@9.973,69.951 11.769,68.155 11.769,65.052 12.954,63.867 12.954,58.093 14.436,56.611 14.436,55.728 14.907,55.257 17.568,55.257 20.151,52.674 20.151,52.533 20.714,51.97 20.855,51.97 24.003,48.822 24.003,45.901 22.86,44.758 v1(22.86,44.504)
"ENET CRS": R11.2 U3.92 | length 29
  Power w0.203: v1(25.654,41.964) 25.527,42.091 25.527,50.695 25.549,50.695 26.416,51.562 R11.2@26.416,52.475 ; U3.92@28.662,31.174 29.43,30.407 29.972,30.407 30.988,29.391 v1(30.988,29.264)
  Signal 2 w0.203: v1(25.654,41.964) 25.654,34.598 v1(30.988,29.264)
"ENET MDC": U2.13 U3.87 | length 34.5
  Power w0.254: U2.13@28.035,59.002 29.337,57.7 29.337,57.204 v1(29.464,57.331) ; v1(29.21,35.741) 29.21,34.162 U3.87@30.43,32.942
  Signal1 w0.254: v1(29.464,57.331) 29.337,57.204 29.972,56.569 v1(34.544,56.569)
  Signal 2 w0.254: v1(29.21,35.741) 29.21,41.837 34.544,47.171 v1(34.544,56.569)
"ENET MDIO": R6.1 U2.12 U3.86 | length 28.3
  Power w0.203: v1(26.543,48.187) 26.499,48.143 26.499,41.968 27.915,40.552 27.915,38.179 R6.1@28.39,37.704 30.016,36.078 30.016,35.407 29.845,35.237 29.845,34.217 29.862,34.217 U3.86@30.784,33.295 ; U2.12@27.285,58.252 27.285,57.922 27.686,57.521 ; v1@27.686,56.569 v1(27.94,56.569)
  Power w0.254: 27.686,57.521 27.94,57.267 v1(27.94,56.569)
  Signal 2 w0.203: v1(26.543,48.187) 27.686,49.33 27.686,49.842 27.642,49.885 27.642,55.636 27.686,55.68 ; v1@27.686,56.569 v1(27.94,56.569)
  Signal 2 w0.254: 27.686,55.68 27.94,55.934 v1(27.94,56.569)
"ENET REF CLK": R8.2 U3.88 | length 35.4
  Power w0.203: v1(28.194,35.106) 28.194,34.471 U3.88@30.077,32.588 ; v1(34.163,62.03) 35.59,62.03 R8.2@36.449,62.889
  Signal 2 w0.203: v1(28.194,35.106) 28.238,35.15 28.238,45.6 28.194,45.643 28.194,46.282 31.293,49.381 31.293,54.98 33.68,57.368 33.68,61.547 v1(34.163,62.03)
"ENET RX ER": R7.1 U2.10 U3.89 | length 29.4
  Power w0.203: U2.10@26.285,58.252 26.285,57.585 26.587,57.284 26.587,56.616 26.285,56.315 26.285,56.184 25.39,55.289 25.39,51.204 24.511,50.326 24.511,39.17 26.104,37.577 R7.1@26.104,35.418 26.54,35.418 U3.89@29.723,32.235
"ENET RXD0": R9.2 U3.91 | length 31.6
  Power w0.203: v1(21.013,52.89) 21.082,52.821 21.082,50.473 21.514,50.041 21.514,46.722 21.47,46.678 21.47,45.632 21.514,45.588 21.514,37.584 21.604,37.494 21.948,37.494 22.454,36.988 22.454,36.644 23.491,35.607 23.838,35.607 24.504,34.941 24.504,34.594 25.973,33.125 27.419,33.125 U3.91@29.016,31.528 ; v1(23.622,50.673) 24.257,51.308 R9.2@24.257,52.475
  Signal1 w0.203: v1(21.013,52.89) 23.23,50.673 v1(23.622,50.673)
"ENET RXD1": R10.2 U3.90 | length 25
  Power w0.203: 21.971,46.532 21.927,46.489 ; R10.2@22.225,52.475 21.927,52.177 21.927,46.489 ; U3.90@29.37,31.881 27.669,33.582 26.162,33.582 24.961,34.783 24.961,35.131 24.028,36.064 23.68,36.064 22.911,36.833 22.911,37.177 22.137,37.951 21.971,37.951 21.971,45.778 21.927,45.821 21.927,46.489
"ENET TX EN": U2.16 U3.93 | length 43
  Power w0.203: v1(27.305,45.393) 27.432,45.266 27.559,45.266 32.639,50.346 32.639,60.252 32.341,60.55 31.416,60.55 31.369,60.502 U2.16@28.035,60.502 ; U3.93@28.309,30.821 28.309,30.8 28.991,30.118 ; 28.991,30.138 28.991,30.118 ; v1(29.591,29.518) 28.991,30.118
  Signal 2 w0.203: v1(27.305,45.393) 27.432,45.266 24.848,42.682 24.848,34.261 v1(29.591,29.518)
"ENET TXD0": U2.17 U3.95 | length 44.4
  Power w0.203: v1(23.368,34.471) 23.368,34.344 26.416,31.296 26.419,31.296 U3.95@27.602,30.113 ; U2.17@28.035,61.002 29.706,61.002 v1(30.099,61.395)
  Signal 2 w0.203: v1(23.368,34.471) 22.015,35.824 21.256,35.824 20.784,36.296 20.784,36.964 21.59,37.769 21.59,42.123 30.378,50.911 30.378,55.359 32.766,57.747 32.766,60.811 32.182,61.395 v1(30.099,61.395)
  Ground w0.203: v1(30.099,61.395) v1@30.099,61.743
"ENET TXD1": U2.18 U3.94 | length 44.7
  Power w0.203: v1(21.59,36.63) 21.792,36.63 23.146,35.277 23.702,35.277 24.174,34.805 24.174,34.249 U3.94@27.955,30.467 ; U2.18@28.035,61.502 29.052,61.502 v1(30.099,62.549)
  Signal 2 w0.203: v1(21.59,36.63) 21.971,37.011 21.971,42.037 30.836,50.902 30.836,55.17 33.223,57.557 33.223,61 31.674,62.549 v1(30.099,62.549)
ETHSUPPLY: C1.1 C2.1 C8.1 C9.1 C10.1 F1.2 P10.4 P10.5 R1.2 R2.2 R3.2 R4.2 U2.1 U2.19 | length 83.6
  Power w0.203: C2.1@11.049,74.508 13.303,74.508 v1(15.748,72.063) 14.859,71.174 R3.2@14.859,69.301 ; R4.2@19.431,69.301 v1(19.431,70.612) ; v1(23.241,64.189) 23.241,62.364 24.035,61.57 U2.1@24.035,61.502 ; R1.2@23.749,66.951 23.781,66.951 v1(25.4,65.332) ; U2.19@27.285,62.252 27.285,63.026 v1(27.686,63.427) ; v1(28.194,65.713) 28.194,66.824 R2.2@28.321,66.951 ; v1(29.21,55.807) 29.21,54.442 C9.1@29.083,54.315 C8.1@31.369,54.315 ; v1(33.528,55.68) 33.782,55.426 C10.1@33.782,54.315 F1.2@36.068,54.315 ; v1(33.782,69.904) 34.163,70.285 C1.1@34.163,71.65
  Signal1 w0.203: v1(15.748,72.063) 18.669,72.063 ; v1(19.431,70.612) 19.231,70.812 19.231,71.501 ; P10.5@21.336,75.946 21.336,74.676 ; P10.4@22.606,73.406 21.336,74.676 ; v1(25.4,65.332) 19.231,71.501 ; v1(29.21,55.807) 29.337,55.68 v1(33.528,55.68) ; 18.669,72.063 18.923,72.317 18.923,74.168 19.431,74.676 21.336,74.676 ; 18.669,72.063 19.231,71.501
  Signal 2 w0.203: v1(23.241,64.189) 24.257,65.205 25.273,65.205 v1(25.4,65.332) 25.781,65.713 v1(28.194,65.713) 29.591,65.713 32.258,68.38 ; v1(29.21,55.807) 28.746,56.271 28.746,56.903 28.067,57.581 28.067,63.046 v1(27.686,63.427) 31.623,63.427 32.258,64.062 32.258,68.38 ; v1(33.782,69.904) 32.258,68.38